# Altium PCB PCB1.PcbDoc
Units mm, origin at the board's own origin, x right, y up, seen from the top; angles counter-clockwise.
Board outline 66.04 x 83.5 mm, 2 copper layers (Top Layer, Bottom Layer); 22 components, 58 nets, 159 pads, 2 vias.
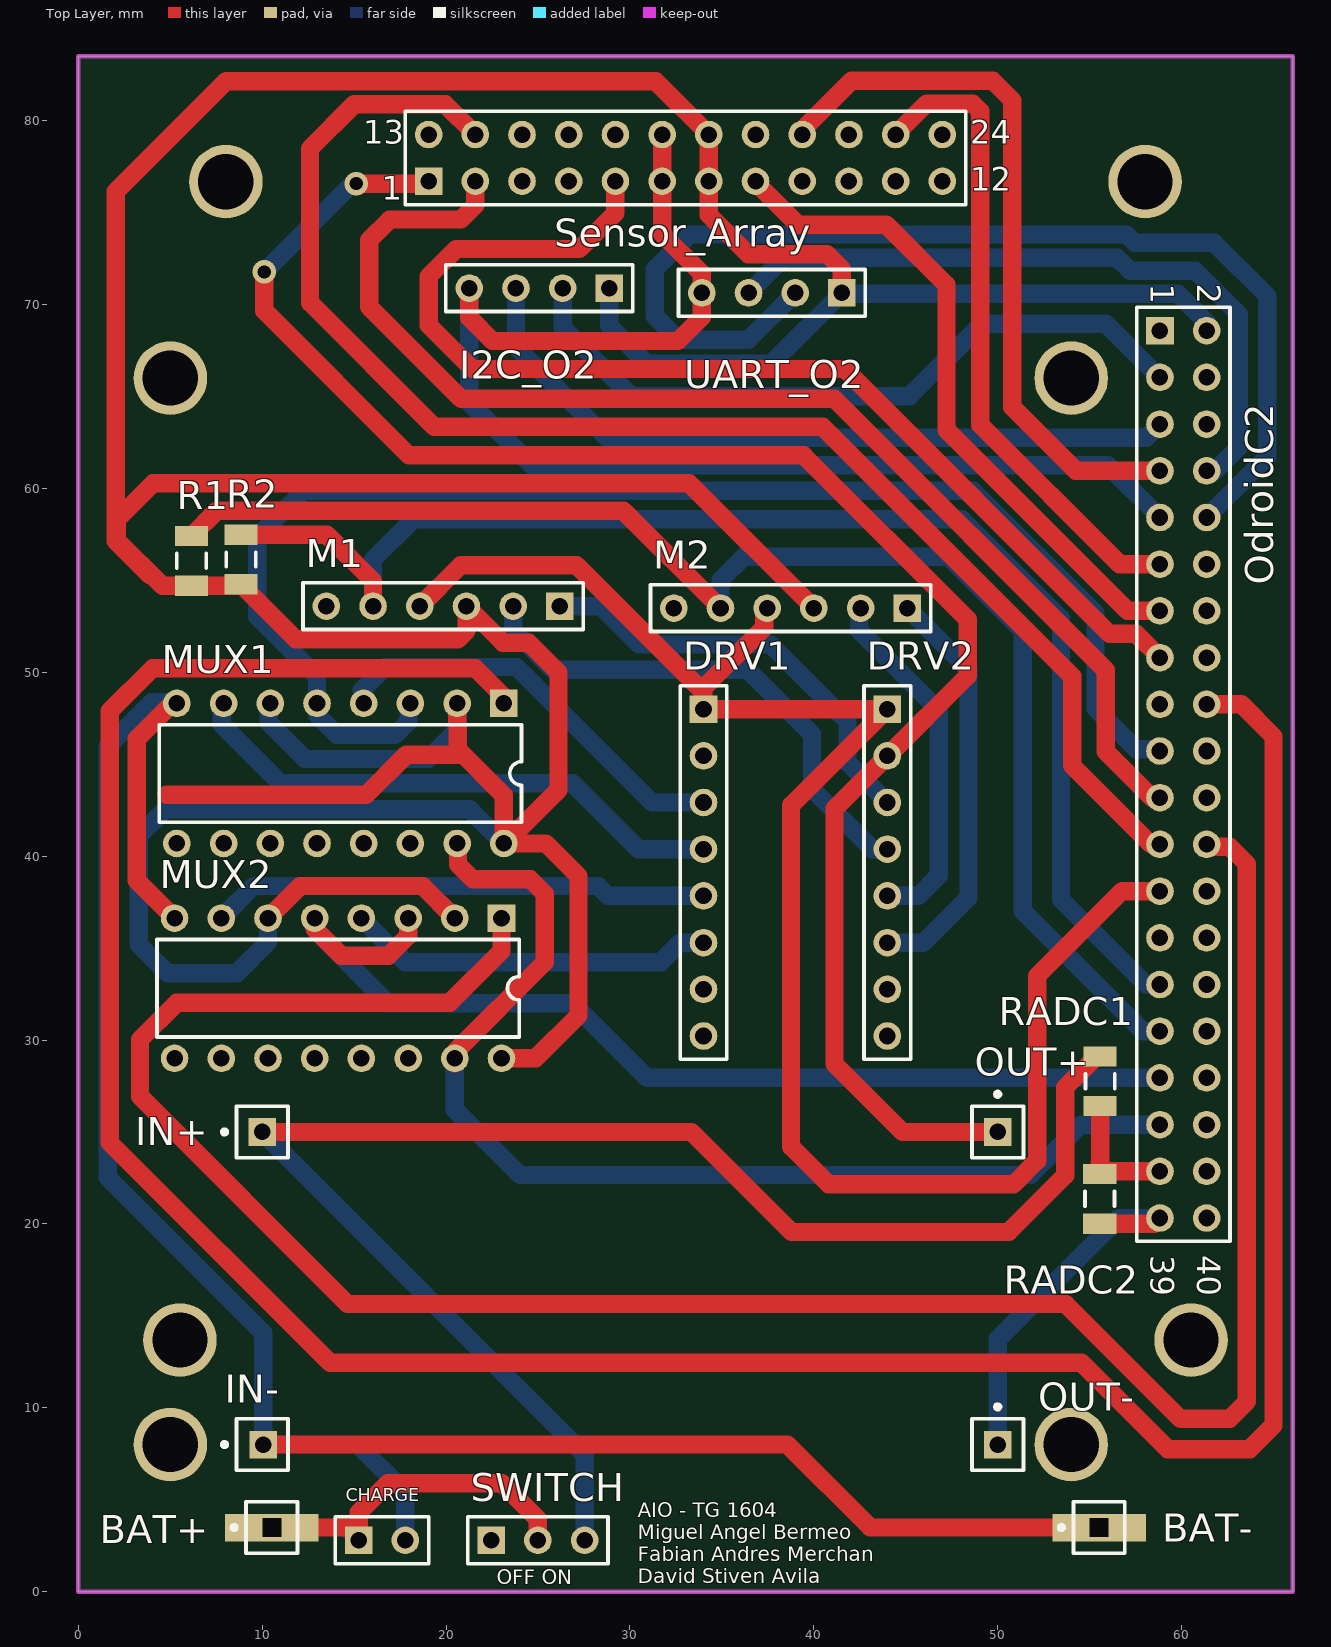
[diagram p0: Top Layer view]
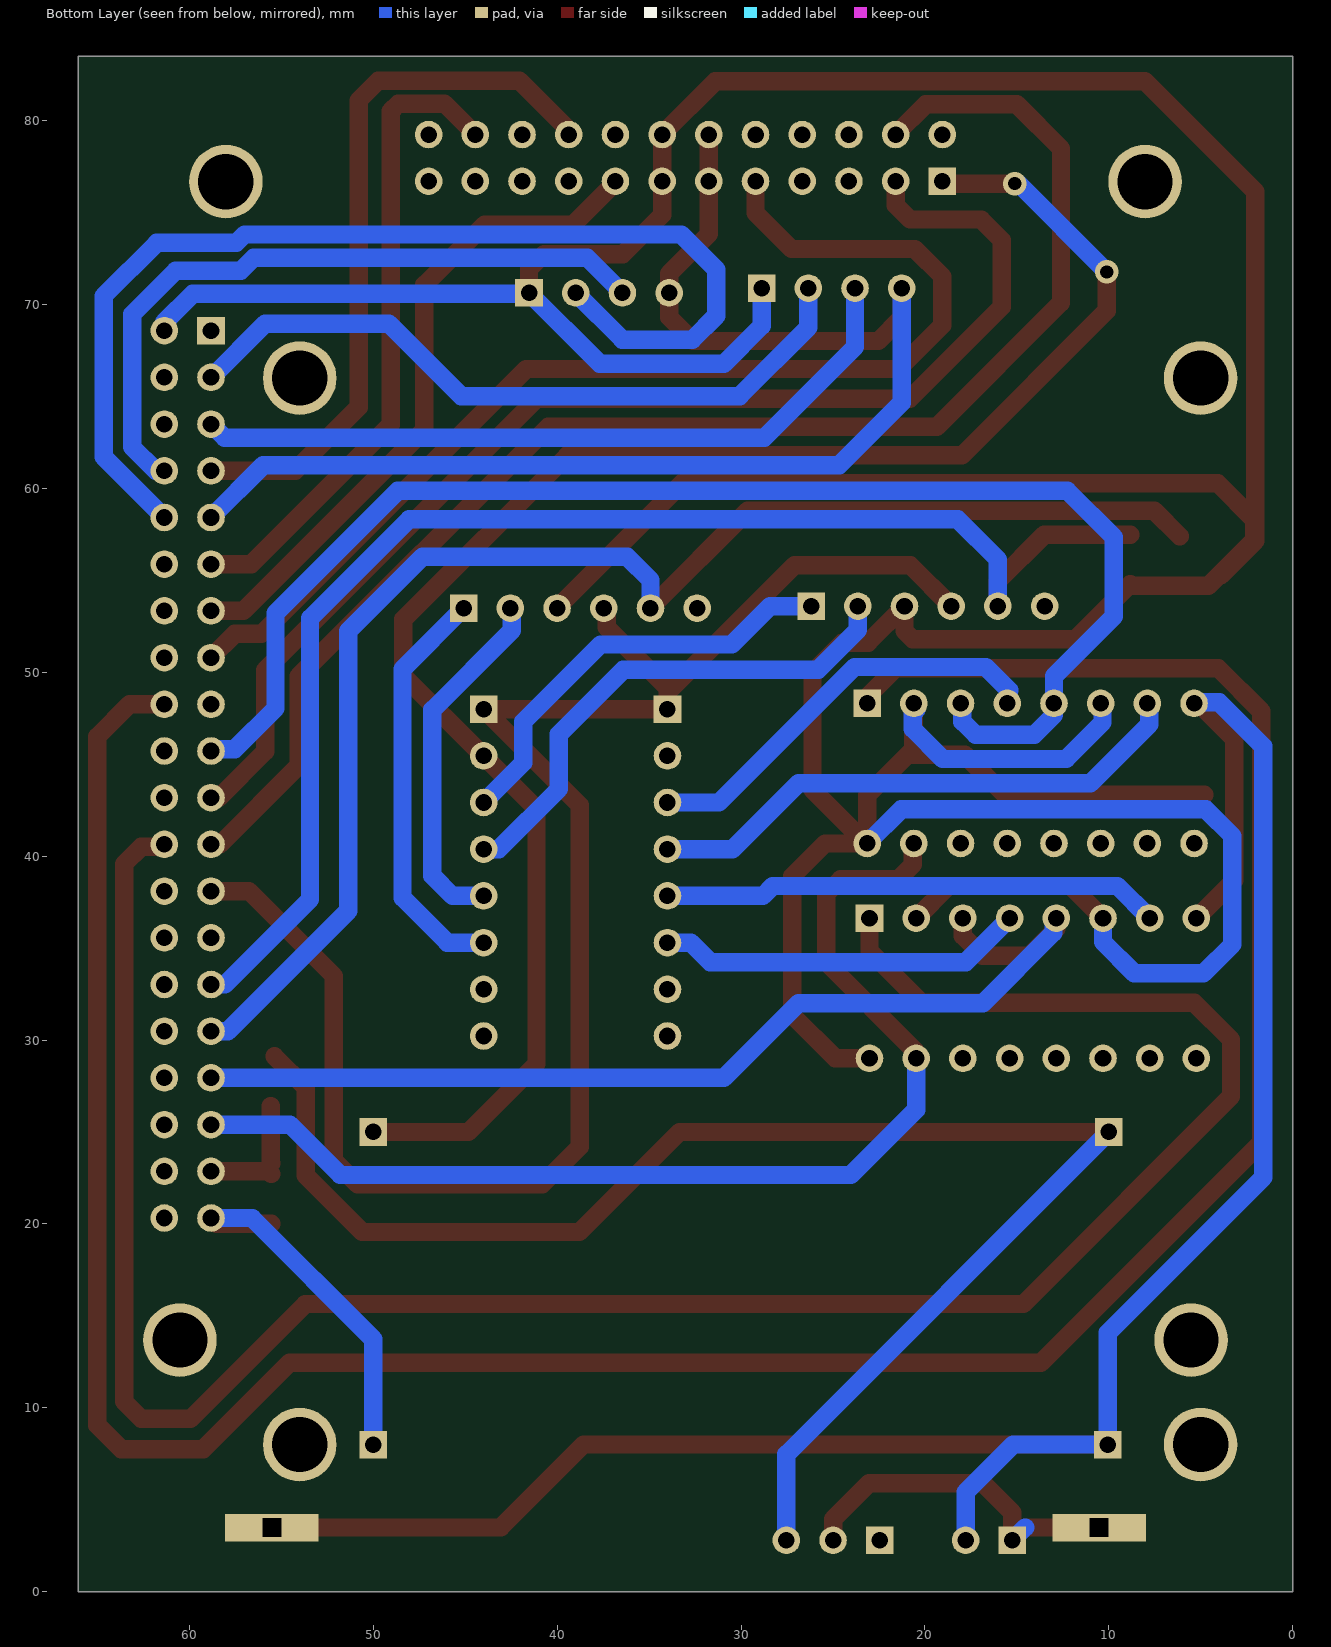
[diagram p1: Bottom Layer view, seen from below]

## Layer stack, top to bottom
Top Solder: solder mask 0.0102, Solder Resist, Dk 3.5
Top Layer: signal copper 0.0356
Dielectric 1: dielectric 0.32, FR-4, Dk 4.8
Bottom Layer: signal copper 1
Bottom Solder: solder mask 0.0102, Solder Resist, Dk 3.5

## Board outline
0,0 66.04,0 66.04,83.5 0,83.5

## Design rules (kind name [scope] priority, off if disabled: settings)
Clearance [All] p1: gap=0.25
DiffPairsRouting [All] p1: maxlimit=0.254 minlimit=0.254 mostfreqgap=0.254 toplayer_minwidth=0.381 toplayer_maxwidth=2 toplayer_prefwidth=0.381 bottomlayer_minwidth=0.381 bottomlayer_maxwidth=2 bottomlayer_prefwidth=0.381 maxuncoupledlength=12.7
PolygonConnect [All] p1: connectstyle=Relief reliefconductorwidth=0.254 reliefentries=4 polygonreliefangle="90 Angle" airgapwidth=0.254
RoomDefinition Sheet_AIO_Shield [InComponentClass('Sheet_AIO_Shield')] p1: confinementstyle=ConfineIn formatcopy=TRUE lockcomponents=FALSE outline -0.127,0.051 65.989,0.051 65.989,83.439 -0.127,83.439
RoutingVias [All] p1: holewidth=0.711 width=1.27 viastyle="Through Hole" minholewidth=0.711 minwidth=1.27 maxholewidth=0.711 maxwidth=1.27
SolderMaskExpansion [All] p1: expansion=0.102
Width [All] p1: maxlimit=2 minlimit=0.252 preferedwidth=1 minimp=50.000000 maximp=50.000000 favimp=50.000000
29 further rules are at their usual default settings.

## Classes and differential pairs
component class Sheet_handling_module: Jump1 Jump2

## Components (designator, comment, footprint, x,y, rotation, side; value= is the part's Value field where it differs from the comment)
BAT+ "Plug" PIN1#1 10.521,3.485 r90 top
BAT- "Plug" PIN1#1 55.519,3.485 r90 top
CHARGE "Header 2" HDR1X2 15.24,2.794 r0 top
DRV1 "Header 8" HDR1X8 34,48 r270 top
DRV2 "Header 8" HDR1X8 44,48 r270 top
I2C_O2 "I2C_ODROID" HDR1X4 28.88,70.891 r180 top
IN+ "Plug" PIN1#2 10,25 r90 top
IN- "Plug" PIN1#3 10,8 r90 top
M1 "Header 6" HDR1X6 26.187,53.594 r180 top
M2 "Header 6" HDR1X6 45.085,53.492 r180 top
MUX1 "Header 8X2A" N016 14.249,44.501 r180 top
MUX2 "Header 8X2A" N016 14.122,32.817 r180 top
OdroidC2 "Header 20X2" HDR2X20 58.826,68.58 r270 top
OUT+ "Plug" PIN1#2 50,25 r0 top
OUT- "Plug" PIN1#2 50,8 r0 top
R1 "Res3" INDC3216 6.147,56.058 r270 top
R2 "Res3" INDC3216 8.839,56.134 r270 top
RADC1 "Res3" INDC3216 55.575,27.762 r90 top
RADC2 "Res3" INDC3216 55.55,21.361 r90 top
Sensor_Array "Header 12X2A" HDR2X12_CEN 19.05,76.708 r0 top
SWITCH "Header 3" HDR1X3 22.454,2.794 r0 top
UART_O2 "UART_ODROID" HDR1X4 41.529,70.637 r180 top

## Footprints (in the part's own frame and the unit in brackets; to place one, negate y for a bottom-side part, rotate by r counter-clockwise, add the part's x,y. Pads: shape width x height; smd on the part's side, far side on the other; paste and mask are expansions set on the pad)
HDR1X2 [mm] "Connector; Header; 2 Position"
  rect 1.5x1.5 hole 0.9: 1(0,0)
  round 1.5 hole 0.9: 2(2.54,0)
  silkscreen extent -1.27,-1.27 3.81,1.27
HDR1X3 [mm] "Connector; Header; 3 Position"
  rect 1.5x1.5 hole 0.9: 1(0,0)
  round 1.5 hole 0.9: 2(2.54,0) 3(5.08,0)
  silkscreen extent -1.27,-1.27 6.35,1.27
HDR1X4 [mm] "Connector; Header; 4 Position"
  rect 1.5x1.5 hole 0.9: 1(0,0)
  round 1.5 hole 0.9: 2(2.54,0) 3(5.08,0) 4(7.62,0)
  silkscreen extent -1.27,-1.27 8.89,1.27
HDR1X6 [mm] "Connector; Header; 6 Position"
  rect 1.5x1.5 hole 0.9: 1(0,0)
  round 1.5 hole 0.9: 2(2.54,0) 3(5.08,0) 4(7.62,0) 5(10.16,0) 6(12.7,0)
  silkscreen extent -1.27,-1.27 13.97,1.27
HDR1X8 [mm] "Connector; Header; 8 Position"
  rect 1.5x1.5 hole 0.9: 1(0,0)
  round 1.5 hole 0.9: 2(2.54,0) 3(5.08,0) 4(7.62,0) 5(10.16,0) 6(12.7,0) 7(15.24,0) 8(17.78,0)
  silkscreen extent -1.27,-1.27 19.05,1.27
HDR2X12_CEN [mm] "Connector; Header; 12x2 Position"
  rect 1.5x1.5 hole 0.9: 1(0,0)
  round 1.5 hole 0.9: 2(2.54,0) 3(5.08,0) 4(7.62,0) 5(10.16,0) 6(12.7,0) 7(15.24,0) 8(17.78,0) 9(20.32,0) 10(22.86,0) 11(25.4,0) 12(27.94,0) 13(0,2.54) 14(2.54,2.54) 15(5.08,2.54) 16(7.62,2.54) 17(10.16,2.54) 18(12.7,2.54) 19(15.24,2.54) 20(17.78,2.54) 21(20.32,2.54) 22(22.86,2.54) 23(25.4,2.54) 24(27.94,2.54)
  silkscreen extent -1.27,-1.27 29.21,3.81
HDR2X20 [mm] "Connector; Header; 20x2 Position"
  rect 1.5x1.5 hole 0.9: 1(0,0)
  round 1.5 hole 0.9: 2(0,2.54) 3(2.54,0) 4(2.54,2.54) 5(5.08,0) 6(5.08,2.54) 7(7.62,0) 8(7.62,2.54) 9(10.16,0) 10(10.16,2.54) 11(12.7,0) 12(12.7,2.54) 13(15.24,0) 14(15.24,2.54) 15(17.78,0) 16(17.78,2.54) 17(20.32,0) 18(20.32,2.54) 19(22.86,0) 20(22.86,2.54) 21(25.4,0) 22(25.4,2.54) 23(27.94,0) 24(27.94,2.54) 25(30.48,0) 26(30.48,2.54) 27(33.02,0) 28(33.02,2.54) 29(35.56,0) 30(35.56,2.54) 31(38.1,0) 32(38.1,2.54) 33(40.64,0) 34(40.64,2.54) 35(43.18,0) 36(43.18,2.54) 37(45.72,0) 38(45.72,2.54) 39(48.26,0) 40(48.26,2.54)
  silkscreen extent -1.27,-1.27 49.53,3.81
INDC3216 [mm] "Chip Inductor, Body 3.2x1.6mm, IPC High Density"
  rect 1.1x1.8 smd: 1(-1.35,0) 2(1.35,0)
  silkscreen extent -0.4,-0.8 0.4,0.8, body extent -1.7,-0.9 1.7,0.9, height 0.55
N016 [mm] "DIP; 16 Leads; Row Spacing 7.62 mm; Pitch 2.54 mm"
  rect 1.5x1.5 hole 0.9: 1(-8.89,-3.81)
  round 1.5 hole 0.9: 2(-6.35,-3.81) 3(-3.81,-3.81) 4(-1.27,-3.81) 5(1.27,-3.81) 6(3.81,-3.81) 7(6.35,-3.81) 8(8.89,-3.81) 9(8.89,3.81) 10(6.35,3.81) 11(3.81,3.81) 12(1.27,3.81) 13(-1.27,3.81) 14(-3.81,3.81) 15(-6.35,3.81) 16(-8.89,3.81)
  silkscreen extent -9.85,-2.65 9.85,2.65
PIN1#1 [mm] "Connector; Plug"
  rect 1.5x5.1 hole 1 square: 1(0,0)
  silkscreen extent -1.4,-1.4 1.4,2.17
PIN1#2 [mm] "Connector; Plug"
  rect 1.5x1.5 hole 0.9: 1(0,0)
  silkscreen extent -1.4,-1.4 1.4,2.17
PIN1#3 [mm] "Connector; Plug"
  rect 1.5x1.5 hole 0.9: 1(0,-0.046)
  silkscreen extent -1.4,-1.4 1.4,2.17

## Part data
CHARGE: "Header, 2-Pin"
DRV1 DRV2: "Header, 8-Pin"
I2C_O2 UART_O2: library part "Header 4", "Header, 4-Pin"
M1 M2: "Header, 6-Pin"
MUX1 MUX2: "Header, 8-Pin, Dual row"
OdroidC2: "Header, 20-Pin, Dual row"
R1 R2 RADC1 RADC2: "Resistor"
Sensor_Array: "Header, 12-Pin, Dual row"
SWITCH: "Header, 3-Pin"

## Free pads (board coordinates)
  round 4 hole 3: 2(5,8) 2(5,66) 2(5.519,13.683) 2(8.019,76.685) 2(54,8) 2(54,66) 2(58.021,76.685) 2(60.521,13.683)

## Via types
v1: diameter 1.27, hole 0.711, Top Layer to Bottom Layer, 2 vias

## Nets (pads, with @x,y where several pads share a name; then routed paths per layer and width w, separated by ;. In a path a pad name is that pad's centre, name@x,y a point inside that pad or via, vN(x,y) a via of type N, cw(c..) or ccw(c..) an arc to the next point about the centre after c; other vN are vias at no path point)
5V: I2C_O2.1 M1.3 M2.3 MUX1.2 MUX1.6 MUX1.16 MUX2.2 MUX2.6 MUX2.16 OdroidC2.2 R1.2 R2.2 Sensor_Array.7 Sensor_Array.19 UART_O2.1 | length 298
  Top Layer w1: 3.912,55.27 2.032,57.15 2.032,76.149 8.026,82.144 31.394,82.144 Sensor_Array.19 Sensor_Array.7 34.29,74.879 36.424,72.746 40.716,72.746 41.529,71.933 UART_O2.1 ; 4.801,43.332 15.646,43.332 17.831,45.517 20.599,45.517 20.599,45.847 20.624,45.822 ; MUX2.6 12.065,38.379 18.72,38.379 MUX2.2 ; MUX1.2 20.624,45.822 ; 20.625,45.745 20.624,45.822 ; MUX2.16 24.867,29.007 27.203,31.344 27.203,38.913 25.425,40.691 MUX1.16 MUX1.16@23.139,40.881 ; M2.3 33.223,60.274 4.064,60.274 2.083,58.293 2.083,57.201 4.576,54.708 R1.2 8.763,54.708 R2.2 11.833,51.791 20.65,51.791 21.107,52.248 M1.3 23.089,51.613 24.486,51.613 26.111,49.987 26.111,43.612 23.381,40.881 MUX1.16@23.139,40.881 ; 20.624,45.822 23.139,43.307 MUX1.16@23.139,40.881
  Bottom Layer w1: MUX2.6 10.312,35.331 8.611,33.63 4.851,33.63 3.277,35.204 3.277,41.097 4.724,42.545 21.285,42.545 MUX1.16 ; MUX1.6@10.338,48.311 10.338,47.269 12.319,45.288 19.025,45.288 20.65,46.914 20.65,47.777 MUX1.2@20.472,47.955 ; I2C_O2.1 28.88,68.834 30.932,66.782 37.674,66.782 UART_O2.1 41.585,70.581 59.822,70.581 61.366,69.037 OdroidC2.2
GND: I2C_O2.4 OdroidC2.9 Sensor_Array.6 Sensor_Array.18 UART_O2.4 | length 72.5
  Top Layer w1: I2C_O2.4 21.26,69.291 22.53,68.021 32.614,68.021 33.909,69.317 UART_O2.4 33.909,71.679 31.75,73.838 Sensor_Array.6 Sensor_Array.18
  Bottom Layer w1: I2C_O2.4 21.26,64.668 24.663,61.265 55.982,61.265 OdroidC2.9
NetBAT+_1: BAT+.1 CHARGE.1 SWITCH.2 | length 18.9
  Top Layer w1: BAT+.1 CHARGE.1@14.549,3.485 ; CHARGE.1 15.24,4.293 16.84,5.893 23.038,5.893 24.994,3.937 SWITCH.2
  Bottom Layer w1: CHARGE.1@14.549,3.485 CHARGE.1
NetBAT-_1: BAT-.1 CHARGE.2 IN-.1 MUX1.8 MUX2.8 | length 118.6
  Top Layer w1: MUX2.8 3.175,38.684 3.175,46.38 5.105,48.311 MUX1.8 ; IN-.1 38.558,8 43.073,3.485 BAT-.1
  Bottom Layer w1: MUX1.8@5.359,48.362 3.988,48.362 1.6,45.974 1.6,22.53 10.046,14.084 IN-.1 15.19,8 17.78,5.41 CHARGE.2
NetC1n_1: 
NetC1n_2: 
NetC100n_1: 
NetD1_1: 
NetDRV1_1: DRV1.1 DRV2.1 M1.4 M2.4 OdroidC2.25 | length 95.4
  Top Layer w1: M1.4 20.803,55.829 27.076,55.829 33.767,49.138 34,49.138 ; M2.4@37.313,53.492 37.313,52.451 34,49.138 ; OdroidC2.25 56.769,38.1 52.146,33.477 52.146,23.444 50.851,22.149 40.818,22.149 38.76,24.206 38.76,42.76 DRV2.1 DRV1.1 34,49.138
NetDRV1_3: DRV1.3 MUX1.4 | length 22.2
  Bottom Layer w1: MUX1.4@15.418,49.022 16.688,50.292 23.825,50.292 31.197,42.92 DRV1.3
NetDRV1_4: DRV1.4 MUX1.7 | length 30.2
  Bottom Layer w1: MUX1.7@7.798,48.311 7.798,47.168 10.998,43.967 26.873,43.967 30.461,40.38 DRV1.4
NetDRV1_5: DRV1.5 MUX2.7 | length 27.2
  Bottom Layer w1: MUX2.7 9.525,38.379 28.27,38.379 28.81,37.84 DRV1.5
NetDRV1_6: DRV1.6 MUX2.4 | length 20
  Bottom Layer w1: MUX2.4 17.78,34.239 31.674,34.239 32.735,35.3 DRV1.6
NetDRV2_2: DRV2.2 OUT+.1 Sensor_Array.1 | length 95.9
  Top Layer w1: v1(10.109,71.78) 10.109,69.672 17.983,61.798 39.446,61.798 48.362,52.883 48.362,49.801 44.021,45.46 DRV2.2 41.123,42.583 41.123,28.702 44.825,25 OUT+.1 ; v1(15.113,76.581) 18.923,76.581 Sensor_Array.1
  Bottom Layer w1: v1(10.109,71.78) 14.91,76.581 v1(15.113,76.581)
NetDRV2_3: DRV2.3 M1.1 | length 23.5
  Bottom Layer w1: M1.1 28.423,53.594 30.505,51.511 37.643,51.511 41.834,47.32 41.834,45.086 DRV2.3
NetDRV2_4: DRV2.4 M1.2 | length 28.3
  Bottom Layer w1: M1.2 23.647,52.299 25.806,50.14 36.398,50.14 39.903,46.634 39.903,43.663 43.186,40.38 DRV2.4
NetDRV2_5: DRV2.5 M2.2 | length 19.5
  Bottom Layer w1: M2.2@42.469,53.416 42.469,52.273 46.787,47.955 46.787,38.938 45.689,37.84 DRV2.5
NetDRV2_6: DRV2.6 M2.1 | length 22.6
  Bottom Layer w1: DRV2.6 45.968,35.3 48.412,37.744 48.412,50.165 M2.1
NetI2C_2: 
NetI2C_3: 
NetI2C_O2_2: I2C_O2.2 OdroidC2.3 | length 39
  Bottom Layer w1: I2C_O2.2 26.34,68.758 30.074,65.024 45.212,65.024 49.149,68.961 55.885,68.961 58.806,66.04 OdroidC2.3
NetI2C_O2_3: I2C_O2.3 OdroidC2.5 | length 40.6
  Bottom Layer w1: I2C_O2.3 23.8,67.691 28.727,62.763 58.09,62.763 OdroidC2.5
NetIN+_1: IN+.1 RADC1.2 SWITCH.3 | length 83.9
  Top Layer w1: IN+.1 33.344,25 38.786,19.558 50.597,19.558 53.67,22.631 53.67,27.41 RADC1.2@55.372,29.112
  Bottom Layer w1: IN+.1 27.534,7.466 SWITCH.3
NetJ1_1: 
NetJ2_1: 
NetJ3_1: 
NetJ3_2: 
NetM1_5: M1.5 OdroidC2.29 R2.1 | length 75.3
  Top Layer w1: R2.1 13.509,57.484 16.027,54.966 M1.5
  Bottom Layer w1: M1.5 16.027,56.134 18.212,58.318 48.057,58.318 53.442,52.934 53.442,37.643 58.064,33.02 OdroidC2.29
NetM2_5: M2.5 OdroidC2.31 R1.1 | length 77.1
  Top Layer w1: R1.1 7.523,58.784 29.633,58.784 M2.5
  Bottom Layer w1: M2.5 34.925,55.016 36.195,56.286 47.32,56.286 51.359,52.248 51.359,37.033 57.912,30.48 OdroidC2.31
NetMSP_PIC_3: 
NetMSP_PIC_4: 
NetMSP_PIC_5: 
NetMSP_PIC_6: 
NetMSP_PIC_7: 
NetMSP_PIC_8: 
NetMSP_PIC_9: 
NetMSP_PIC_10: 
NetMSP_PIC_11: 
NetMSP_PIC_12: 
NetMSP_PIC_13: 
NetMSP_PIC_17: 
NetMSP_PIC_18: 
NetMSP_PIC_19: 
NetMUX1_1: MUX1.1 OdroidC2.18 | length 158.9
  Top Layer w1: MUX1.1@23.038,48.768 21.59,50.216 4.039,50.216 1.702,47.879 1.702,24.435 13.691,12.446 54.559,12.446 59.258,7.747 63.703,7.747 65.004,9.048 65.004,46.507 63.251,48.26 OdroidC2.18
NetMUX1_3: MUX1.3 MUX1.5 OdroidC2.19 | length 76.9
  Bottom Layer w1: MUX1.3@17.958,48.311 17.958,47.32 17.247,46.609 14.046,46.609 12.979,47.676 MUX1.5 12.979,49.784 9.728,53.035 9.728,57.353 12.243,59.868 48.666,59.868 55.321,53.213 55.321,48.031 57.531,45.822 OdroidC2.19@59.004,45.822
NetMUX1_15: MUX1.15 MUX2.15 OdroidC2.35 | length 61.3
  Top Layer w1: MUX2.15@20.472,28.727 MUX2.15 20.472,29.337 25.375,34.239 25.375,37.948 24.587,38.735 21.463,38.735 20.65,39.548 20.65,40.538 MUX1.15@20.498,40.691
  Bottom Layer w1: MUX2.15@20.472,28.727 20.472,26.213 24.028,22.657 51.791,22.657 54.534,25.4 OdroidC2.35
NetMUX2_1: MUX2.1 OdroidC2.24 | length 125.9
  Top Layer w1: MUX2.1 23.012,34.849 20.193,32.029 5.359,32.029 3.353,30.023 3.353,26.939 14.646,15.646 53.696,15.646 59.944,9.398 62.611,9.398 63.551,10.338 63.551,39.573 62.611,40.513 OdroidC2.24@61.646,40.513
NetMUX2_3: MUX2.3 MUX2.5 OdroidC2.33 | length 57.7
  Top Layer w1: MUX2.5 12.852,36.043 14.3,34.595 16.866,34.595 17.932,35.662 MUX2.3
  Bottom Layer w1: MUX2.5@13.005,36.805 13.005,35.839 16.84,32.004 26.873,32.004 30.937,27.94 OdroidC2.33
NetOdroidC2_7: OdroidC2.7 Sensor_Array.21 | length 39.4
  Top Layer w1: Sensor_Array.21 39.37,79.489 42.062,82.181 49.721,82.181 50.8,81.102 50.8,64.414 54.254,60.96 OdroidC2.7
NetOdroidC2_8: OdroidC2.8 UART_O2.3 | length 38.2
  Bottom Layer w1: UART_O2.3 38.354,72.542 56.507,72.542 57.218,71.831 60.754,71.831 63.119,69.467 63.119,62.255 61.824,60.96 OdroidC2.8
NetOdroidC2_10: OdroidC2.10 UART_O2.2 | length 60.7
  Bottom Layer w1: UART_O2.2 36.449,68.097 32.639,68.097 31.344,69.393 31.344,71.907 33.249,73.812 57.005,73.812 57.462,73.355 61.773,73.355 64.668,70.46 64.668,61.722 OdroidC2.10
NetOdroidC2_11: OdroidC2.11 Sensor_Array.23 | length 35.4
  Top Layer w1: Sensor_Array.23 46.133,80.931 48.634,80.931 49.047,80.518 49.047,63.475 56.642,55.88 OdroidC2.11
NetOdroidC2_13: OdroidC2.13 Sensor_Array.8 | length 36.4
  Top Layer w1: Sensor_Array.8 36.779,76.708 39.141,74.346 43.942,74.346 47.219,71.069 47.219,63.195 57.074,53.34 OdroidC2.13
NetOdroidC2_15: OdroidC2.15 Sensor_Array.5 | length 63.2
  Top Layer w1: Sensor_Array.5 29.21,74.981 27.254,73.025 20.549,73.025 19.05,71.526 19.05,68.885 21.438,66.497 41.681,66.497 56.089,52.09 57.536,52.09 OdroidC2.15
NetOdroidC2_21: OdroidC2.21 Sensor_Array.2 | length 68.1
  Top Layer w1: Sensor_Array.2 21.59,75.413 20.803,74.625 16.942,74.625 15.824,73.508 15.824,69.875 20.828,64.872 41.123,64.872 55.88,50.114 55.88,45.695 58.395,43.18 OdroidC2.21
NetOdroidC2_23: OdroidC2.23 Sensor_Array.14 | length 80.3
  Top Layer w1: Sensor_Array.14 19.944,80.894 15.006,80.894 12.598,78.486 12.598,70.104 19.355,63.348 40.488,63.348 54.051,49.784 54.051,44.933 58.344,40.64 OdroidC2.23
NetOdroidC2_37: OdroidC2.37 RADC1.1 RADC2.2 | length 6.5
  Top Layer w1: RADC2.2 55.698,22.86 OdroidC2.37 ; 55.55,23.296 55.575,23.321 RADC1.1
NetOdroidC2_39: OdroidC2.39 OUT-.1 RADC2.1 | length 20.9
  Top Layer w1: RADC2.1 58.518,20.011 OdroidC2.39
  Bottom Layer w1: OUT-.1 50,13.729 56.591,20.32 OdroidC2.39 OdroidC2.39@58.699,20.193
pads on no net: DRV1.2 DRV1.7 DRV1.8 DRV2.7 DRV2.8 M1.6 M2.6 MUX1.9 MUX1.10 MUX1.11 MUX1.12 MUX1.13 MUX1.14 MUX2.9 MUX2.10 MUX2.11 MUX2.12 MUX2.13 MUX2.14 OdroidC2.1 OdroidC2.4 OdroidC2.6 OdroidC2.12 OdroidC2.14 OdroidC2.16 OdroidC2.17 OdroidC2.20 OdroidC2.22 OdroidC2.26 OdroidC2.27 OdroidC2.28 OdroidC2.30 OdroidC2.32 OdroidC2.34 OdroidC2.36 OdroidC2.38 OdroidC2.40 Sensor_Array.3 Sensor_Array.4 Sensor_Array.9 Sensor_Array.10 Sensor_Array.11 Sensor_Array.12 Sensor_Array.13 Sensor_Array.15 Sensor_Array.16 Sensor_Array.17 Sensor_Array.20 Sensor_Array.22 Sensor_Array.24 SWITCH.1

## Keep-outs
Top Layer:
  the board outline again, w0.254

## Silkscreen, mask and mechanical layers (free items; w line width, h text height)
Top Overlay:
  text "AIO - TG 1604 / Miguel Angel Bermeo / Fabian Andres Merchan / David Stiven Avila" at 30.429,0.457 h0.8
  text "OFF ON" at 22.758,0.406 h0.8

## Text inside footprints (layer, text, board x,y; h text height)
OdroidC2: Top Overlay "39" at 58.318,18.288 h1.27 r270; Top Overlay "40" at 60.858,18.288 h1.27 r270; Top Overlay "2" at 60.858,71.12 h1.27 r270; Top Overlay "1" at 58.318,71.12 h1.27 r270
Sensor_Array: Top Overlay "24" at 48.514,78.74 h1.27; Top Overlay "12" at 48.514,76.2 h1.27; Top Overlay "13" at 15.494,78.74 h1.27; Top Overlay "1" at 16.51,75.692 h1.27